# EAGLE board placa_conexoes_painel2 (EAGLE 7.7.0)
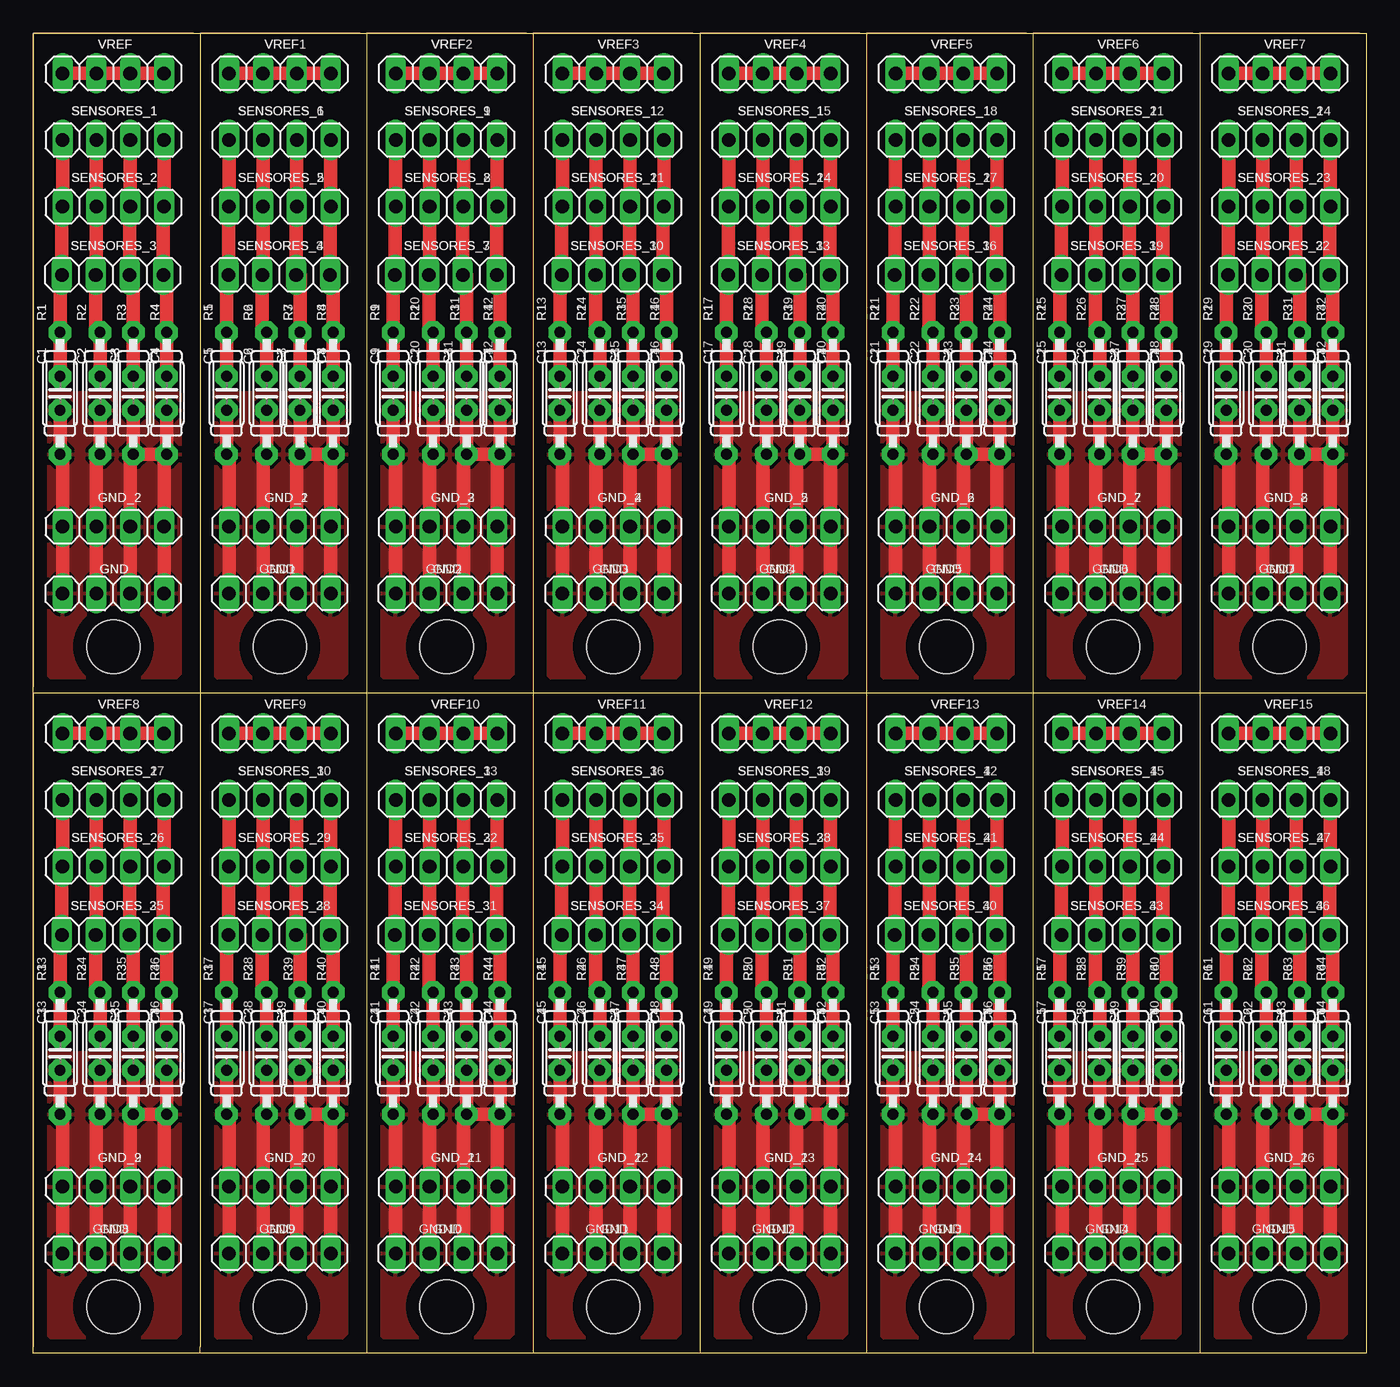
[diagram p0: board, top side]

Size 100 x 99 mm. Coordinates in mm from the lower left corner, seen from the top.
Outline: 12,99 0,99
Outline: 0,99 0,50
Outline: 24.5,99 12.5,99 12.5,50 12.5,49.5
Outline: 37,99 25,99 25,50 25,49
Outline: 49.5,99 37.5,99 37.5,50 37.5,49.5
Outline: 62,99 50,99 50,50 50,49
Outline: 74.5,99 62.5,99 62.5,50 62.5,49.5
Outline: 87,99 75,99 75,50 75,49
Outline: 99.5,99 99,99
Outline: 99,99 87.5,99 87.5,50 87.5,49
Outline: 0,49.5 0,49
Outline: 0,49 0,0.5
Outline: 12.5,49.5 12.5,0.5 12.5,0 25,0
Outline: 25,49.5 25,49
Outline: 25,49 25,1
Outline: 25,1 25,0.5
Outline: 49.5,49.5 37.5,49.5
Outline: 37.5,49.5 37.5,0.5 37.5,0
Outline: 62,49.5 50,49.5 50,49
Outline: 50,49 50,1
Outline: 50,1 50,0.5
Outline: 74.5,49.5 62.5,49.5
Outline: 62.5,49.5 62.5,0.5 62.5,0
Outline: 87,49.5 75,49.5 75,49
Outline: 75,49 75,1
Outline: 75,1 75,0.5
Outline: 99.5,49.5 87.5,49.5 87.5,49
Outline: 87.5,49 87.5,0.5 87.5,0
Outline: 0,49 0,0 25,0
Outline: 0,49 0,50
Outline: 0,50 0,99
Outline: 0,99 99,99
Outline: 99,99 100,99 100,49.5
Outline: 100,49.5 100,0 87.5,0
Outline: 87.5,0 75,0
Outline: 75,0 62.5,0
Outline: 62.5,0 50,0
Outline: 50,0 37.5,0
Outline: 37.5,0 25,0
Outline: 37.5,49.5 12.5,49.5
Outline: 12.5,49.5 0,49.5
Outline: 0,49.5 0,49
Outline: 100,49.5 62.5,49.5
Outline: 62.5,49.5 37.5,49.5
Outline: 37.5,49.5 0,49.5
Outline: 0,49.5 0,50
Outline: 75,1 75,0
Outline: 50,1 50,0
Outline: 25,1 25,0
Copper layers (1*16): Top 0.035mm / dielectric 1.5mm / Bottom 0.035mm
Design rules "default": minimum track width 10mil, minimum drill 24mil, track to track 8mil, track to pad 8mil, pad to pad 8mil, via to via 8mil, smd to smd 8mil, copper to edge 40mil, drill to drill 8mil, minimum pad ring 10mil, minimum via ring 8mil, stop-mask expansion 4mil, vias tented up to drill 0mil, thermal gap 10mil
Holes 4 mm at 6,53 18.5,53 31,53 43.5,53 56,53 68.5,53 81,53 93.5,53 6,3.5 18.5,3.5 31,3.5 43.5,3.5 56,3.5 68.5,3.5 81,3.5 93.5,3.5

## Footprints (pad centres in the part's own frame; a part is rotated, then mirrored left to right if it is on the bottom)
C025-025X050 = drill 0.813 pad 1.676 octagon: 1 -1.27,0; 2 1.27,0
1X04 = drill 1.016 long: 1 -3.81,0; 2 -1.27,0; 3 1.27,0; 4 3.81,0
0207/9 = drill 0.813 pad 1.676 octagon: 1 -4.572,0; 2 4.572,0

## Placement (x,y rotation side)
C1  [C025-025X050]  2,72 90 top
C2  [C025-025X050]  5,72 90 top
C3  [C025-025X050]  7.5,72 90 top
C4  [C025-025X050]  10,72 90 top
C5  [C025-025X050]  14.5,72 90 top
C6  [C025-025X050]  17.5,72 90 top
C7  [C025-025X050]  20,72 90 top
C8  [C025-025X050]  22.5,72 90 top
C9  [C025-025X050]  27,72 90 top
C10  [C025-025X050]  30,72 90 top
C11  [C025-025X050]  32.5,72 90 top
C12  [C025-025X050]  35,72 90 top
C13  [C025-025X050]  39.5,72 90 top
C14  [C025-025X050]  42.5,72 90 top
C15  [C025-025X050]  45,72 90 top
C16  [C025-025X050]  47.5,72 90 top
C17  [C025-025X050]  52,72 90 top
C18  [C025-025X050]  55,72 90 top
C19  [C025-025X050]  57.5,72 90 top
C20  [C025-025X050]  60,72 90 top
C21  [C025-025X050]  64.5,72 90 top
C22  [C025-025X050]  67.5,72 90 top
C23  [C025-025X050]  70,72 90 top
C24  [C025-025X050]  72.5,72 90 top
C25  [C025-025X050]  77,72 90 top
C26  [C025-025X050]  80,72 90 top
C27  [C025-025X050]  82.5,72 90 top
C28  [C025-025X050]  85,72 90 top
C29  [C025-025X050]  89.5,72 90 top
C30  [C025-025X050]  92.5,72 90 top
C31  [C025-025X050]  95,72 90 top
C32  [C025-025X050]  97.5,72 90 top
C33  [C025-025X050]  2,22.5 90 top
C34  [C025-025X050]  5,22.5 90 top
C35  [C025-025X050]  7.5,22.5 90 top
C36  [C025-025X050]  10,22.5 90 top
C37  [C025-025X050]  14.5,22.5 90 top
C38  [C025-025X050]  17.5,22.5 90 top
C39  [C025-025X050]  20,22.5 90 top
C40  [C025-025X050]  22.5,22.5 90 top
C41  [C025-025X050]  27,22.5 90 top
C42  [C025-025X050]  30,22.5 90 top
C43  [C025-025X050]  32.5,22.5 90 top
C44  [C025-025X050]  35,22.5 90 top
C45  [C025-025X050]  39.5,22.5 90 top
C46  [C025-025X050]  42.5,22.5 90 top
C47  [C025-025X050]  45,22.5 90 top
C48  [C025-025X050]  47.5,22.5 90 top
C49  [C025-025X050]  52,22.5 90 top
C50  [C025-025X050]  55,22.5 90 top
C51  [C025-025X050]  57.5,22.5 90 top
C52  [C025-025X050]  60,22.5 90 top
C53  [C025-025X050]  64.5,22.5 90 top
C54  [C025-025X050]  67.5,22.5 90 top
C55  [C025-025X050]  70,22.5 90 top
C56  [C025-025X050]  72.5,22.5 90 top
C57  [C025-025X050]  77,22.5 90 top
C58  [C025-025X050]  80,22.5 90 top
C59  [C025-025X050]  82.5,22.5 90 top
C60  [C025-025X050]  85,22.5 90 top
C61  [C025-025X050]  89.5,22.5 90 top
C62  [C025-025X050]  92.5,22.5 90 top
C63  [C025-025X050]  95,22.5 90 top
C64  [C025-025X050]  97.5,22.5 90 top
GND  [1X04]  6,57 180 top
GND1  [1X04]  18.5,57 180 top
GND2  [1X04]  31,57 180 top
GND3  [1X04]  43.5,57 180 top
GND4  [1X04]  56,57 180 top
GND5  [1X04]  68.5,57 180 top
GND6  [1X04]  81,57 180 top
GND7  [1X04]  93.5,57 180 top
GND8  [1X04]  6,7.5 180 top
GND9  [1X04]  18.5,7.5 180 top
GND10  [1X04]  31,7.5 180 top
GND11  [1X04]  43.5,7.5 180 top
GND12  [1X04]  56,7.5 180 top
GND13  [1X04]  68.5,7.5 180 top
GND14  [1X04]  81,7.5 180 top
GND15  [1X04]  93.5,7.5 180 top
GND_1  [1X04]  18.5,62 0 top
GND_2  [1X04]  6,62 0 top
GND_3  [1X04]  31,62 0 top
GND_4  [1X04]  43.5,62 0 top
GND_5  [1X04]  56,62 0 top
GND_6  [1X04]  68.5,62 0 top
GND_7  [1X04]  81,62 0 top
GND_8  [1X04]  93.5,62 0 top
GND_9  [1X04]  6,12.5 0 top
GND_10  [1X04]  18.5,12.5 0 top
GND_11  [1X04]  31,12.5 0 top
GND_12  [1X04]  43.5,12.5 0 top
GND_13  [1X04]  56,12.5 0 top
GND_14  [1X04]  68.5,12.5 0 top
GND_15  [1X04]  81,12.5 0 top
GND_16  [1X04]  93.5,12.5 0 top
R1  [0207/9]  2,72 90 top
R2  [0207/9]  5,72 90 top
R3  [0207/9]  7.5,72 90 top
R4  [0207/9]  10,72 90 top
R5  [0207/9]  14.5,72 90 top
R6  [0207/9]  17.5,72 90 top
R7  [0207/9]  20,72 90 top
R8  [0207/9]  22.5,72 90 top
R9  [0207/9]  27,72 90 top
R10  [0207/9]  30,72 90 top
R11  [0207/9]  32.5,72 90 top
R12  [0207/9]  35,72 90 top
R13  [0207/9]  39.5,72 90 top
R14  [0207/9]  42.5,72 90 top
R15  [0207/9]  45,72 90 top
R16  [0207/9]  47.5,72 90 top
R17  [0207/9]  52,72 90 top
R18  [0207/9]  55,72 90 top
R19  [0207/9]  57.5,72 90 top
R20  [0207/9]  60,72 90 top
R21  [0207/9]  64.5,72 90 top
R22  [0207/9]  67.5,72 90 top
R23  [0207/9]  70,72 90 top
R24  [0207/9]  72.5,72 90 top
R25  [0207/9]  77,72 90 top
R26  [0207/9]  80,72 90 top
R27  [0207/9]  82.5,72 90 top
R28  [0207/9]  85,72 90 top
R29  [0207/9]  89.5,72 90 top
R30  [0207/9]  92.5,72 90 top
R31  [0207/9]  95,72 90 top
R32  [0207/9]  97.5,72 90 top
R33  [0207/9]  2,22.5 90 top
R34  [0207/9]  5,22.5 90 top
R35  [0207/9]  7.5,22.5 90 top
R36  [0207/9]  10,22.5 90 top
R37  [0207/9]  14.5,22.5 90 top
R38  [0207/9]  17.5,22.5 90 top
R39  [0207/9]  20,22.5 90 top
R40  [0207/9]  22.5,22.5 90 top
R41  [0207/9]  27,22.5 90 top
R42  [0207/9]  30,22.5 90 top
R43  [0207/9]  32.5,22.5 90 top
R44  [0207/9]  35,22.5 90 top
R45  [0207/9]  39.5,22.5 90 top
R46  [0207/9]  42.5,22.5 90 top
R47  [0207/9]  45,22.5 90 top
R48  [0207/9]  47.5,22.5 90 top
R49  [0207/9]  52,22.5 90 top
R50  [0207/9]  55,22.5 90 top
R51  [0207/9]  57.5,22.5 90 top
R52  [0207/9]  60,22.5 90 top
R53  [0207/9]  64.5,22.5 90 top
R54  [0207/9]  67.5,22.5 90 top
R55  [0207/9]  70,22.5 90 top
R56  [0207/9]  72.5,22.5 90 top
R57  [0207/9]  77,22.5 90 top
R58  [0207/9]  80,22.5 90 top
R59  [0207/9]  82.5,22.5 90 top
R60  [0207/9]  85,22.5 90 top
R61  [0207/9]  89.5,22.5 90 top
R62  [0207/9]  92.5,22.5 90 top
R63  [0207/9]  95,22.5 90 top
R64  [0207/9]  97.5,22.5 90 top
SENSORES_1  [1X04]  6,91 0 top
SENSORES_2  [1X04]  6,86 0 top
SENSORES_3  [1X04]  5.95,80.89 0 top
SENSORES_4  [1X04]  18.45,80.89 0 top
SENSORES_5  [1X04]  18.5,86 0 top
SENSORES_6  [1X04]  18.5,91 0 top
SENSORES_7  [1X04]  30.95,80.89 0 top
SENSORES_8  [1X04]  31,86 0 top
SENSORES_9  [1X04]  31,91 0 top
SENSORES_10  [1X04]  43.45,80.89 0 top
SENSORES_11  [1X04]  43.5,86 0 top
SENSORES_12  [1X04]  43.5,91 0 top
SENSORES_13  [1X04]  55.95,80.89 0 top
SENSORES_14  [1X04]  56,86 0 top
SENSORES_15  [1X04]  56,91 0 top
SENSORES_16  [1X04]  68.45,80.89 0 top
SENSORES_17  [1X04]  68.5,86 0 top
SENSORES_18  [1X04]  68.5,91 0 top
SENSORES_19  [1X04]  80.95,80.89 0 top
SENSORES_20  [1X04]  81,86 0 top
SENSORES_21  [1X04]  81,91 0 top
SENSORES_22  [1X04]  93.45,80.89 0 top
SENSORES_23  [1X04]  93.5,86 0 top
SENSORES_24  [1X04]  93.5,91 0 top
SENSORES_25  [1X04]  5.95,31.39 0 top
SENSORES_26  [1X04]  6,36.5 0 top
SENSORES_27  [1X04]  6,41.5 0 top
SENSORES_28  [1X04]  18.45,31.39 0 top
SENSORES_29  [1X04]  18.5,36.5 0 top
SENSORES_30  [1X04]  18.5,41.5 0 top
SENSORES_31  [1X04]  30.95,31.39 0 top
SENSORES_32  [1X04]  31,36.5 0 top
SENSORES_33  [1X04]  31,41.5 0 top
SENSORES_34  [1X04]  43.45,31.39 0 top
SENSORES_35  [1X04]  43.5,36.5 0 top
SENSORES_36  [1X04]  43.5,41.5 0 top
SENSORES_37  [1X04]  55.95,31.39 0 top
SENSORES_38  [1X04]  56,36.5 0 top
SENSORES_39  [1X04]  56,41.5 0 top
SENSORES_40  [1X04]  68.45,31.39 0 top
SENSORES_41  [1X04]  68.5,36.5 0 top
SENSORES_42  [1X04]  68.5,41.5 0 top
SENSORES_43  [1X04]  80.95,31.39 0 top
SENSORES_44  [1X04]  81,36.5 0 top
SENSORES_45  [1X04]  81,41.5 0 top
SENSORES_46  [1X04]  93.45,31.39 0 top
SENSORES_47  [1X04]  93.5,36.5 0 top
SENSORES_48  [1X04]  93.5,41.5 0 top
VREF  [1X04]  6,96 0 top
VREF1  [1X04]  18.5,96 0 top
VREF2  [1X04]  31,96 0 top
VREF3  [1X04]  43.5,96 0 top
VREF4  [1X04]  56,96 0 top
VREF5  [1X04]  68.5,96 0 top
VREF6  [1X04]  81,96 0 top
VREF7  [1X04]  93.5,96 0 top
VREF8  [1X04]  6,46.5 0 top
VREF9  [1X04]  18.5,46.5 0 top
VREF10  [1X04]  31,46.5 0 top
VREF11  [1X04]  43.5,46.5 0 top
VREF12  [1X04]  56,46.5 0 top
VREF13  [1X04]  68.5,46.5 0 top
VREF14  [1X04]  81,46.5 0 top
VREF15  [1X04]  93.5,46.5 0 top

## Library data of the parts
C1-C64 R1-R64 = adafruit
GND GND1-GND15 GND_1-GND_16 SENSORES_1-SENSORES_48 VREF VREF1-VREF15 = pinhead

## Nets
ADC1: C1.2 R1.2 SENSORES_1.1 SENSORES_2.1 SENSORES_3.1
ADC2: C2.2 R2.2 SENSORES_1.2 SENSORES_2.2 SENSORES_3.2
ADC3: C3.2 R3.2 SENSORES_1.3 SENSORES_2.3 SENSORES_3.3
ADC4: C4.2 R4.2 SENSORES_1.4 SENSORES_2.4 SENSORES_3.4
ADC5: C8.2 R8.2 SENSORES_4.4 SENSORES_5.4 SENSORES_6.4
ADC6: C7.2 R7.2 SENSORES_4.3 SENSORES_5.3 SENSORES_6.3
ADC7: C6.2 R6.2 SENSORES_4.2 SENSORES_5.2 SENSORES_6.2
ADC8: C5.2 R5.2 SENSORES_4.1 SENSORES_5.1 SENSORES_6.1
ADC9: C12.2 R12.2 SENSORES_7.4 SENSORES_8.4 SENSORES_9.4
ADC10: C11.2 R11.2 SENSORES_7.3 SENSORES_8.3 SENSORES_9.3
ADC11: C10.2 R10.2 SENSORES_7.2 SENSORES_8.2 SENSORES_9.2
ADC12: C9.2 R9.2 SENSORES_7.1 SENSORES_8.1 SENSORES_9.1
ADC13: C16.2 R16.2 SENSORES_10.4 SENSORES_11.4 SENSORES_12.4
ADC14: C15.2 R15.2 SENSORES_10.3 SENSORES_11.3 SENSORES_12.3
ADC15: C14.2 R14.2 SENSORES_10.2 SENSORES_11.2 SENSORES_12.2
ADC16: C13.2 R13.2 SENSORES_10.1 SENSORES_11.1 SENSORES_12.1
ADC17: C20.2 R20.2 SENSORES_13.4 SENSORES_14.4 SENSORES_15.4
ADC18: C19.2 R19.2 SENSORES_13.3 SENSORES_14.3 SENSORES_15.3
ADC19: C18.2 R18.2 SENSORES_13.2 SENSORES_14.2 SENSORES_15.2
ADC20: C17.2 R17.2 SENSORES_13.1 SENSORES_14.1 SENSORES_15.1
ADC21: C24.2 R24.2 SENSORES_16.4 SENSORES_17.4 SENSORES_18.4
ADC22: C23.2 R23.2 SENSORES_16.3 SENSORES_17.3 SENSORES_18.3
ADC23: C22.2 R22.2 SENSORES_16.2 SENSORES_17.2 SENSORES_18.2
ADC24: C21.2 R21.2 SENSORES_16.1 SENSORES_17.1 SENSORES_18.1
ADC25: C28.2 R28.2 SENSORES_19.4 SENSORES_20.4 SENSORES_21.4
ADC26: C27.2 R27.2 SENSORES_19.3 SENSORES_20.3 SENSORES_21.3
ADC27: C26.2 R26.2 SENSORES_19.2 SENSORES_20.2 SENSORES_21.2
ADC28: C25.2 R25.2 SENSORES_19.1 SENSORES_20.1 SENSORES_21.1
ADC29: C32.2 R32.2 SENSORES_22.4 SENSORES_23.4 SENSORES_24.4
ADC30: C31.2 R31.2 SENSORES_22.3 SENSORES_23.3 SENSORES_24.3
ADC31: C30.2 R30.2 SENSORES_22.2 SENSORES_23.2 SENSORES_24.2
ADC32: C29.2 R29.2 SENSORES_22.1 SENSORES_23.1 SENSORES_24.1
ADC33: C36.2 R36.2 SENSORES_25.4 SENSORES_26.4 SENSORES_27.4
ADC34: C35.2 R35.2 SENSORES_25.3 SENSORES_26.3 SENSORES_27.3
ADC35: C34.2 R34.2 SENSORES_25.2 SENSORES_26.2 SENSORES_27.2
ADC36: C33.2 R33.2 SENSORES_25.1 SENSORES_26.1 SENSORES_27.1
ADC37: C40.2 R40.2 SENSORES_28.4 SENSORES_29.4 SENSORES_30.4
ADC38: C39.2 R39.2 SENSORES_28.3 SENSORES_29.3 SENSORES_30.3
ADC39: C38.2 R38.2 SENSORES_28.2 SENSORES_29.2 SENSORES_30.2
ADC40: C37.2 R37.2 SENSORES_28.1 SENSORES_29.1 SENSORES_30.1
ADC41: C44.2 R44.2 SENSORES_31.4 SENSORES_32.4 SENSORES_33.4
ADC42: C43.2 R43.2 SENSORES_31.3 SENSORES_32.3 SENSORES_33.3
ADC43: C42.2 R42.2 SENSORES_31.2 SENSORES_32.2 SENSORES_33.2
ADC44: C41.2 R41.2 SENSORES_31.1 SENSORES_32.1 SENSORES_33.1
ADC45: C48.2 R48.2 SENSORES_34.4 SENSORES_35.4 SENSORES_36.4
ADC46: C47.2 R47.2 SENSORES_34.3 SENSORES_35.3 SENSORES_36.3
ADC47: C46.2 R46.2 SENSORES_34.2 SENSORES_35.2 SENSORES_36.2
ADC48: C45.2 R45.2 SENSORES_34.1 SENSORES_35.1 SENSORES_36.1
ADC49: C52.2 R52.2 SENSORES_37.4 SENSORES_38.4 SENSORES_39.4
ADC50: C51.2 R51.2 SENSORES_37.3 SENSORES_38.3 SENSORES_39.3
ADC51: C50.2 R50.2 SENSORES_37.2 SENSORES_38.2 SENSORES_39.2
ADC52: C49.2 R49.2 SENSORES_37.1 SENSORES_38.1 SENSORES_39.1
ADC53: C56.2 R56.2 SENSORES_40.4 SENSORES_41.4 SENSORES_42.4
ADC54: C55.2 R55.2 SENSORES_40.3 SENSORES_41.3 SENSORES_42.3
ADC55: C54.2 R54.2 SENSORES_40.2 SENSORES_41.2 SENSORES_42.2
ADC56: C53.2 R53.2 SENSORES_40.1 SENSORES_41.1 SENSORES_42.1
ADC57: C60.2 R60.2 SENSORES_43.4 SENSORES_44.4 SENSORES_45.4
ADC58: C59.2 R59.2 SENSORES_43.3 SENSORES_44.3 SENSORES_45.3
ADC59: C58.2 R58.2 SENSORES_43.2 SENSORES_44.2 SENSORES_45.2
ADC60: C57.2 R57.2 SENSORES_43.1 SENSORES_44.1 SENSORES_45.1
ADC61: C64.2 R64.2 SENSORES_46.4 SENSORES_47.4 SENSORES_48.4
ADC62: C63.2 R63.2 SENSORES_46.3 SENSORES_47.3 SENSORES_48.3
ADC63: C62.2 R62.2 SENSORES_46.2 SENSORES_47.2 SENSORES_48.2
ADC64: C61.2 R61.2 SENSORES_46.1 SENSORES_47.1 SENSORES_48.1
GND: C1.1 C2.1 C3.1 C4.1 GND.1 GND.2 GND.3 GND.4 GND_2.1 GND_2.2 GND_2.3 GND_2.4 R1.1 R2.1 R3.1 R4.1
GND1: C5.1 C6.1 C7.1 C8.1 GND1.1 GND1.2 GND1.3 GND1.4 GND_1.1 GND_1.2 GND_1.3 GND_1.4 R5.1 R6.1 R7.1 R8.1
GND2: C9.1 C10.1 C11.1 C12.1 GND2.1 GND2.2 GND2.3 GND2.4 GND_3.1 GND_3.2 GND_3.3 GND_3.4 R9.1 R10.1 R11.1 R12.1
GND3: C13.1 C14.1 C15.1 C16.1 GND3.1 GND3.2 GND3.3 GND3.4 GND_4.1 GND_4.2 GND_4.3 GND_4.4 R13.1 R14.1 R15.1 R16.1
GND4: C17.1 C18.1 C19.1 C20.1 GND4.1 GND4.2 GND4.3 GND4.4 GND_5.1 GND_5.2 GND_5.3 GND_5.4 R17.1 R18.1 R19.1 R20.1
GND5: C21.1 C22.1 C23.1 C24.1 GND5.1 GND5.2 GND5.3 GND5.4 GND_6.1 GND_6.2 GND_6.3 GND_6.4 R21.1 R22.1 R23.1 R24.1
GND6: C25.1 C26.1 C27.1 C28.1 GND6.1 GND6.2 GND6.3 GND6.4 GND_7.1 GND_7.2 GND_7.3 GND_7.4 R25.1 R26.1 R27.1 R28.1
GND7: C29.1 C30.1 C31.1 C32.1 GND7.1 GND7.2 GND7.3 GND7.4 GND_8.1 GND_8.2 GND_8.3 GND_8.4 R29.1 R30.1 R31.1 R32.1
GND8: C33.1 C34.1 C35.1 C36.1 GND8.1 GND8.2 GND8.3 GND8.4 GND_9.1 GND_9.2 GND_9.3 GND_9.4 R33.1 R34.1 R35.1 R36.1
GND9: C37.1 C38.1 C39.1 C40.1 GND9.1 GND9.2 GND9.3 GND9.4 GND_10.1 GND_10.2 GND_10.3 GND_10.4 R37.1 R38.1 R39.1 R40.1
GND10: C41.1 C42.1 C43.1 C44.1 GND10.1 GND10.2 GND10.3 GND10.4 GND_11.1 GND_11.2 GND_11.3 GND_11.4 R41.1 R42.1 R43.1 R44.1
GND11: C45.1 C46.1 C47.1 C48.1 GND11.1 GND11.2 GND11.3 GND11.4 GND_12.1 GND_12.2 GND_12.3 GND_12.4 R45.1 R46.1 R47.1 R48.1
GND12: C49.1 C50.1 C51.1 C52.1 GND12.1 GND12.2 GND12.3 GND12.4 GND_13.1 GND_13.2 GND_13.3 GND_13.4 R49.1 R50.1 R51.1 R52.1
GND13: C53.1 C54.1 C55.1 C56.1 GND13.1 GND13.2 GND13.3 GND13.4 GND_14.1 GND_14.2 GND_14.3 GND_14.4 R53.1 R54.1 R55.1 R56.1
GND14: C57.1 C58.1 C59.1 C60.1 GND14.1 GND14.2 GND14.3 GND14.4 GND_15.1 GND_15.2 GND_15.3 GND_15.4 R57.1 R58.1 R59.1 R60.1
GND15: C61.1 C62.1 C63.1 C64.1 GND15.1 GND15.2 GND15.3 GND15.4 GND_16.1 GND_16.2 GND_16.3 GND_16.4 R61.1 R62.1 R63.1 R64.1
VCC: VREF.1 VREF.2 VREF.3 VREF.4
VCC1: VREF1.1 VREF1.2 VREF1.3 VREF1.4
VCC2: VREF2.1 VREF2.2 VREF2.3 VREF2.4
VCC3: VREF3.1 VREF3.2 VREF3.3 VREF3.4
VCC4: VREF4.1 VREF4.2 VREF4.3 VREF4.4
VCC5: VREF5.1 VREF5.2 VREF5.3 VREF5.4
VCC6: VREF6.1 VREF6.2 VREF6.3 VREF6.4
VCC7: VREF7.1 VREF7.2 VREF7.3 VREF7.4
VCC8: VREF8.1 VREF8.2 VREF8.3 VREF8.4
VCC9: VREF9.1 VREF9.2 VREF9.3 VREF9.4
VCC10: VREF10.1 VREF10.2 VREF10.3 VREF10.4
VCC11: VREF11.1 VREF11.2 VREF11.3 VREF11.4
VCC12: VREF12.1 VREF12.2 VREF12.3 VREF12.4
VCC13: VREF13.1 VREF13.2 VREF13.3 VREF13.4
VCC14: VREF14.1 VREF14.2 VREF14.3 VREF14.4
VCC15: VREF15.1 VREF15.2 VREF15.3 VREF15.4

## Tracks (layer width: path | path; a pad name or v marks a point on that pad's centre or on a via)
ADC1
  Top 1.016: SENSORES_1.1 SENSORES_2.1 2.14,86 SENSORES_3.1 2,80.89 R1.2 C1.2
ADC2
  Top 1.016: C2.2 R2.2 4.68,76.57 SENSORES_3.2 4.73,80.89 SENSORES_2.2 SENSORES_1.2
ADC3
  Top 1.016: SENSORES_1.3 SENSORES_2.3 7.22,86 SENSORES_3.3 7.5,80.89 R3.2 C3.2
ADC4
  Top 1.016: SENSORES_1.4 SENSORES_2.4 9.76,86 SENSORES_3.4 10,80.89 R4.2 C4.2
ADC5
  Top 1.016: SENSORES_6.4 SENSORES_5.4 22.26,86 SENSORES_4.4 22.5,80.89 R8.2 C8.2
ADC6
  Top 1.016: SENSORES_6.3 SENSORES_5.3 19.72,86 SENSORES_4.3 20,80.89 R7.2 C7.2
ADC7
  Top 1.016: C6.2 R6.2 17.18,76.57 SENSORES_4.2 17.23,80.89 SENSORES_5.2 SENSORES_6.2
ADC8
  Top 1.016: SENSORES_6.1 SENSORES_5.1 14.64,86 SENSORES_4.1 14.5,80.89 R5.2 C5.2
ADC9
  Top 1.016: SENSORES_9.4 SENSORES_8.4 34.76,86 SENSORES_7.4 35,80.89 R12.2 C12.2
ADC10
  Top 1.016: SENSORES_9.3 SENSORES_8.3 32.22,86 SENSORES_7.3 32.5,80.89 R11.2 C11.2
ADC11
  Top 1.016: C10.2 R10.2 29.68,76.57 SENSORES_7.2 29.73,80.89 SENSORES_8.2 SENSORES_9.2
ADC12
  Top 1.016: SENSORES_9.1 SENSORES_8.1 27.14,86 SENSORES_7.1 27,80.89 R9.2 C9.2
ADC13
  Top 1.016: SENSORES_12.4 SENSORES_11.4 47.26,86 SENSORES_10.4 47.5,80.89 R16.2 C16.2
ADC14
  Top 1.016: SENSORES_12.3 SENSORES_11.3 44.72,86 SENSORES_10.3 45,80.89 R15.2 C15.2
ADC15
  Top 1.016: C14.2 R14.2 42.18,76.57 SENSORES_10.2 42.23,80.89 SENSORES_11.2 SENSORES_12.2
ADC16
  Top 1.016: SENSORES_12.1 SENSORES_11.1 39.64,86 SENSORES_10.1 39.5,80.89 R13.2 C13.2
ADC17
  Top 1.016: SENSORES_15.4 SENSORES_14.4 59.76,86 SENSORES_13.4 60,80.89 R20.2 C20.2
ADC18
  Top 1.016: SENSORES_15.3 SENSORES_14.3 57.22,86 SENSORES_13.3 57.5,80.89 R19.2 C19.2
ADC19
  Top 1.016: C18.2 R18.2 54.68,76.57 SENSORES_13.2 54.73,80.89 SENSORES_14.2 SENSORES_15.2
ADC20
  Top 1.016: SENSORES_15.1 SENSORES_14.1 52.14,86 SENSORES_13.1 52,80.89 R17.2 C17.2
ADC21
  Top 1.016: SENSORES_18.4 SENSORES_17.4 72.26,86 SENSORES_16.4 72.5,80.89 R24.2 C24.2
ADC22
  Top 1.016: SENSORES_18.3 SENSORES_17.3 69.72,86 SENSORES_16.3 70,80.89 R23.2 C23.2
ADC23
  Top 1.016: C22.2 R22.2 67.18,76.57 SENSORES_16.2 67.23,80.89 SENSORES_17.2 SENSORES_18.2
ADC24
  Top 1.016: SENSORES_18.1 SENSORES_17.1 64.64,86 SENSORES_16.1 64.5,80.89 R21.2 C21.2
ADC25
  Top 1.016: SENSORES_21.4 SENSORES_20.4 84.76,86 SENSORES_19.4 85,80.89 R28.2 C28.2
ADC26
  Top 1.016: SENSORES_21.3 SENSORES_20.3 82.22,86 SENSORES_19.3 82.5,80.89 R27.2 C27.2
ADC27
  Top 1.016: C26.2 R26.2 79.68,76.57 SENSORES_19.2 79.73,80.89 SENSORES_20.2 SENSORES_21.2
ADC28
  Top 1.016: SENSORES_21.1 SENSORES_20.1 77.14,86 SENSORES_19.1 77,80.89 R25.2 C25.2
ADC29
  Top 1.016: SENSORES_24.4 SENSORES_23.4 97.26,86 SENSORES_22.4 97.5,80.89 R32.2 C32.2
ADC30
  Top 1.016: SENSORES_24.3 SENSORES_23.3 94.72,86 SENSORES_22.3 95,80.89 R31.2 C31.2
ADC31
  Top 1.016: C30.2 R30.2 92.18,76.57 SENSORES_22.2 92.23,80.89 SENSORES_23.2 SENSORES_24.2
ADC32
  Top 1.016: SENSORES_24.1 SENSORES_23.1 89.64,86 SENSORES_22.1 89.5,80.89 R29.2 C29.2
ADC33
  Top 1.016: SENSORES_27.4 SENSORES_26.4 9.76,36.5 SENSORES_25.4 10,31.39 R36.2 C36.2
ADC34
  Top 1.016: SENSORES_27.3 SENSORES_26.3 7.22,36.5 SENSORES_25.3 7.5,31.39 R35.2 C35.2
ADC35
  Top 1.016: C34.2 R34.2 4.68,27.07 SENSORES_25.2 4.73,31.39 SENSORES_26.2 SENSORES_27.2
ADC36
  Top 1.016: SENSORES_27.1 SENSORES_26.1 2.14,36.5 SENSORES_25.1 2,31.39 R33.2 C33.2
ADC37
  Top 1.016: SENSORES_30.4 SENSORES_29.4 22.26,36.5 SENSORES_28.4 22.5,31.39 R40.2 C40.2
ADC38
  Top 1.016: SENSORES_30.3 SENSORES_29.3 19.72,36.5 SENSORES_28.3 20,31.39 R39.2 C39.2
ADC39
  Top 1.016: C38.2 R38.2 17.18,27.07 SENSORES_28.2 17.23,31.39 SENSORES_29.2 SENSORES_30.2
ADC40
  Top 1.016: SENSORES_30.1 SENSORES_29.1 14.64,36.5 SENSORES_28.1 14.5,31.39 R37.2 C37.2
ADC41
  Top 1.016: SENSORES_33.4 SENSORES_32.4 34.76,36.5 SENSORES_31.4 35,31.39 R44.2 C44.2
ADC42
  Top 1.016: SENSORES_33.3 SENSORES_32.3 32.22,36.5 SENSORES_31.3 32.5,31.39 R43.2 C43.2
ADC43
  Top 1.016: C42.2 R42.2 29.68,27.07 SENSORES_31.2 29.73,31.39 SENSORES_32.2 SENSORES_33.2
ADC44
  Top 1.016: SENSORES_33.1 SENSORES_32.1 27.14,36.5 SENSORES_31.1 27,31.39 R41.2 C41.2
ADC45
  Top 1.016: SENSORES_36.4 SENSORES_35.4 47.26,36.5 SENSORES_34.4 47.5,31.39 R48.2 C48.2
ADC46
  Top 1.016: SENSORES_36.3 SENSORES_35.3 44.72,36.5 SENSORES_34.3 45,31.39 R47.2 C47.2
ADC47
  Top 1.016: C46.2 R46.2 42.18,27.07 SENSORES_34.2 42.23,31.39 SENSORES_35.2 SENSORES_36.2
ADC48
  Top 1.016: SENSORES_36.1 SENSORES_35.1 39.64,36.5 SENSORES_34.1 39.5,31.39 R45.2 C45.2
ADC49
  Top 1.016: SENSORES_39.4 SENSORES_38.4 59.76,36.5 SENSORES_37.4 60,31.39 R52.2 C52.2
ADC50
  Top 1.016: SENSORES_39.3 SENSORES_38.3 57.22,36.5 SENSORES_37.3 57.5,31.39 R51.2 C51.2
ADC51
  Top 1.016: C50.2 R50.2 54.68,27.07 SENSORES_37.2 54.73,31.39 SENSORES_38.2 SENSORES_39.2
ADC52
  Top 1.016: SENSORES_39.1 SENSORES_38.1 52.14,36.5 SENSORES_37.1 52,31.39 R49.2 C49.2
ADC53
  Top 1.016: SENSORES_42.4 SENSORES_41.4 72.26,36.5 SENSORES_40.4 72.5,31.39 R56.2 C56.2
ADC54
  Top 1.016: SENSORES_42.3 SENSORES_41.3 69.72,36.5 SENSORES_40.3 70,31.39 R55.2 C55.2
ADC55
  Top 1.016: C54.2 R54.2 67.18,27.07 SENSORES_40.2 67.23,31.39 SENSORES_41.2 SENSORES_42.2
ADC56
  Top 1.016: SENSORES_42.1 SENSORES_41.1 64.64,36.5 SENSORES_40.1 64.5,31.39 R53.2 C53.2
ADC57
  Top 1.016: SENSORES_45.4 SENSORES_44.4 84.76,36.5 SENSORES_43.4 85,31.39 R60.2 C60.2
ADC58
  Top 1.016: SENSORES_45.3 SENSORES_44.3 82.22,36.5 SENSORES_43.3 82.5,31.39 R59.2 C59.2
ADC59
  Top 1.016: C58.2 R58.2 79.68,27.07 SENSORES_43.2 79.73,31.39 SENSORES_44.2 SENSORES_45.2
ADC60
  Top 1.016: SENSORES_45.1 SENSORES_44.1 77.14,36.5 SENSORES_43.1 77,31.39 R57.2 C57.2
ADC61
  Top 1.016: SENSORES_48.4 SENSORES_47.4 97.26,36.5 SENSORES_46.4 97.5,31.39 R64.2 C64.2
ADC62
  Top 1.016: SENSORES_48.3 SENSORES_47.3 94.72,36.5 SENSORES_46.3 95,31.39 R63.2 C63.2
ADC63
  Top 1.016: C62.2 R62.2 92.18,27.07 SENSORES_46.2 92.23,31.39 SENSORES_47.2 SENSORES_48.2
ADC64
  Top 1.016: SENSORES_48.1 SENSORES_47.1 89.64,36.5 SENSORES_46.1 89.5,31.39 R61.2 C61.2
GND
  Top 1.016: C1.1 R1.1 2.19,67.43 GND_2.1 GND.4 | C2.1 R2.1 4.73,67.43 GND_2.2 GND.3 | C3.1 R3.1 7.27,67.43 | 7.27,67.43 GND_2.3 GND.2 | C4.1 R4.1 | 7.27,67.43 9.81,67.43 GND_2.4 GND.1
  pour Top: 11,72 0.5,72 0.5,51.5 2,50 10,50 11,51
GND1
  Top 1.016: C5.1 R5.1 14.69,67.43 GND_1.1 GND1.4 | C6.1 R6.1 17.23,67.43 GND_1.2 GND1.3 | C7.1 R7.1 19.77,67.43 | 19.77,67.43 GND_1.3 GND1.2 | C8.1 R8.1 | 19.77,67.43 22.31,67.43 GND_1.4 GND1.1
  pour Top: 23.5,72 13,72 13,51.5 14.5,50 22.5,50 23.5,51
GND2
  Top 1.016: C9.1 R9.1 27.19,67.43 GND_3.1 GND2.4 | C10.1 R10.1 29.73,67.43 GND_3.2 GND2.3 | C11.1 R11.1 32.27,67.43 | 32.27,67.43 GND_3.3 GND2.2 | C12.1 R12.1 | 32.27,67.43 34.81,67.43 GND_3.4 GND2.1
  pour Top: 36,72 25.5,72 25.5,51.5 27,50 35,50 36,51
GND3
  Top 1.016: C13.1 R13.1 39.69,67.43 GND_4.1 GND3.4 | C14.1 R14.1 42.23,67.43 GND_4.2 GND3.3 | C15.1 R15.1 44.77,67.43 | 44.77,67.43 GND_4.3 GND3.2 | C16.1 R16.1 | 44.77,67.43 47.31,67.43 GND_4.4 GND3.1
  pour Top: 48.5,72 38,72 38,51.5 39.5,50 47.5,50 48.5,51
GND4
  Top 1.016: C17.1 R17.1 52.19,67.43 GND_5.1 GND4.4 | C18.1 R18.1 54.73,67.43 GND_5.2 GND4.3 | C19.1 R19.1 57.27,67.43 | 57.27,67.43 GND_5.3 GND4.2 | C20.1 R20.1 | 57.27,67.43 59.81,67.43 GND_5.4 GND4.1
  pour Top: 61,72 50.5,72 50.5,51.5 52,50 60,50 61,51
GND5
  Top 1.016: C21.1 R21.1 64.69,67.43 GND_6.1 GND5.4 | C22.1 R22.1 67.23,67.43 GND_6.2 GND5.3 | C23.1 R23.1 69.77,67.43 | 69.77,67.43 GND_6.3 GND5.2 | C24.1 R24.1 | 69.77,67.43 72.31,67.43 GND_6.4 GND5.1
  pour Top: 73.5,72 63,72 63,51.5 64.5,50 72.5,50 73.5,51
GND6
  Top 1.016: C25.1 R25.1 77.19,67.43 GND_7.1 GND6.4 | C26.1 R26.1 79.73,67.43 GND_7.2 GND6.3 | C27.1 R27.1 82.27,67.43 | 82.27,67.43 GND_7.3 GND6.2 | C28.1 R28.1 | 82.27,67.43 84.81,67.43 GND_7.4 GND6.1
  pour Top: 86,72 75.5,72 75.5,51.5 77,50 85,50 86,51
GND7
  Top 1.016: C29.1 R29.1 89.69,67.43 GND_8.1 GND7.4 | C30.1 R30.1 92.23,67.43 GND_8.2 GND7.3 | C31.1 R31.1 94.77,67.43 | 94.77,67.43 GND_8.3 GND7.2 | C32.1 R32.1 | 94.77,67.43 97.31,67.43 GND_8.4 GND7.1
  pour Top: 98.5,72 88,72 88,51.5 89.5,50 97.5,50 98.5,51
GND8
  Top 1.016: C33.1 R33.1 2.19,17.93 GND_9.1 GND8.4 | C34.1 R34.1 4.73,17.93 GND_9.2 GND8.3 | C35.1 R35.1 7.27,17.93 | 7.27,17.93 GND_9.3 GND8.2 | C36.1 R36.1 | 7.27,17.93 9.81,17.93 GND_9.4 GND8.1
  pour Top: 11,22.5 0.5,22.5 0.5,2 2,0.5 10,0.5 11,1.5
GND9
  Top 1.016: C37.1 R37.1 14.69,17.93 GND_10.1 GND9.4 | C38.1 R38.1 17.23,17.93 GND_10.2 GND9.3 | C39.1 R39.1 19.77,17.93 | 19.77,17.93 GND_10.3 GND9.2 | C40.1 R40.1 | 19.77,17.93 22.31,17.93 GND_10.4 GND9.1
  pour Top: 23.5,22.5 13,22.5 13,2 14.5,0.5 22.5,0.5 23.5,1.5
GND10
  Top 1.016: C41.1 R41.1 27.19,17.93 GND_11.1 GND10.4 | C42.1 R42.1 29.73,17.93 GND_11.2 GND10.3 | C43.1 R43.1 32.27,17.93 | 32.27,17.93 GND_11.3 GND10.2 | C44.1 R44.1 | 32.27,17.93 34.81,17.93 GND_11.4 GND10.1
  pour Top: 36,22.5 25.5,22.5 25.5,2 27,0.5 35,0.5 36,1.5
GND11
  Top 1.016: C45.1 R45.1 39.69,17.93 GND_12.1 GND11.4 | C46.1 R46.1 42.23,17.93 GND_12.2 GND11.3 | C47.1 R47.1 44.77,17.93 | 44.77,17.93 GND_12.3 GND11.2 | C48.1 R48.1 | 44.77,17.93 47.31,17.93 GND_12.4 GND11.1
  pour Top: 48.5,22.5 38,22.5 38,2 39.5,0.5 47.5,0.5 48.5,1.5
GND12
  Top 1.016: C49.1 R49.1 52.19,17.93 GND_13.1 GND12.4 | C50.1 R50.1 54.73,17.93 GND_13.2 GND12.3 | C51.1 R51.1 57.27,17.93 | 57.27,17.93 GND_13.3 GND12.2 | C52.1 R52.1 | 57.27,17.93 59.81,17.93 GND_13.4 GND12.1
  pour Top: 61,22.5 50.5,22.5 50.5,2 52,0.5 60,0.5 61,1.5
GND13
  Top 1.016: C53.1 R53.1 64.69,17.93 GND_14.1 GND13.4 | C54.1 R54.1 67.23,17.93 GND_14.2 GND13.3 | C55.1 R55.1 69.77,17.93 | 69.77,17.93 GND_14.3 GND13.2 | C56.1 R56.1 | 69.77,17.93 72.31,17.93 GND_14.4 GND13.1
  pour Top: 73.5,22.5 63,22.5 63,2 64.5,0.5 72.5,0.5 73.5,1.5
GND14
  Top 1.016: C57.1 R57.1 77.19,17.93 GND_15.1 GND14.4 | C58.1 R58.1 79.73,17.93 GND_15.2 GND14.3 | C59.1 R59.1 82.27,17.93 | 82.27,17.93 GND_15.3 GND14.2 | C60.1 R60.1 | 82.27,17.93 84.81,17.93 GND_15.4 GND14.1
  pour Top: 86,22.5 75.5,22.5 75.5,2 77,0.5 85,0.5 86,1.5
GND15
  Top 1.016: C61.1 R61.1 89.69,17.93 GND_16.1 GND15.4 | C62.1 R62.1 92.23,17.93 GND_16.2 GND15.3 | C63.1 R63.1 94.77,17.93 | 94.77,17.93 GND_16.3 GND15.2 | C64.1 R64.1 | 94.77,17.93 97.31,17.93 GND_16.4 GND15.1
  pour Top: 98.5,22.5 88,22.5 88,2 89.5,0.5 97.5,0.5 98.5,1.5
VCC
  Top 1.016: VREF.1 VREF.2 VREF.3 VREF.4
VCC1
  Top 1.016: VREF1.1 VREF1.2 VREF1.3 VREF1.4
VCC2
  Top 1.016: VREF2.1 VREF2.2 VREF2.3 VREF2.4
VCC3
  Top 1.016: VREF3.1 VREF3.2 VREF3.3 VREF3.4
VCC4
  Top 1.016: VREF4.1 VREF4.2 VREF4.3 VREF4.4
VCC5
  Top 1.016: VREF5.1 VREF5.2 VREF5.3 VREF5.4
VCC6
  Top 1.016: VREF6.1 VREF6.2 VREF6.3 VREF6.4
VCC7
  Top 1.016: VREF7.1 VREF7.2 VREF7.3 VREF7.4
VCC8
  Top 1.016: VREF8.1 VREF8.2 VREF8.3 VREF8.4
VCC9
  Top 1.016: VREF9.1 VREF9.2 VREF9.3 VREF9.4
VCC10
  Top 1.016: VREF10.1 VREF10.2 VREF10.3 VREF10.4
VCC11
  Top 1.016: VREF11.1 VREF11.2 VREF11.3 VREF11.4
VCC12
  Top 1.016: VREF12.1 VREF12.2 VREF12.3 VREF12.4
VCC13
  Top 1.016: VREF13.1 VREF13.2 VREF13.3 VREF13.4
VCC14
  Top 1.016: VREF14.1 VREF14.2 VREF14.3 VREF14.4
VCC15
  Top 1.016: VREF15.1 VREF15.2 VREF15.3 VREF15.4

## Text on the board
_tNames: VREF | VREF | VREF | VREF | VREF | VREF | VREF | VREF | SENSORES_1 | SENSORES_1 | SENSORES_1 | SENSORES_1 | SENSORES_1 | SENSORES_1 | SENSORES_1 | SENSORES_1 | SENSORES_2 | SENSORES_2 | SENSORES_2 | SENSORES_2 | SENSORES_2 | SENSORES_2 | SENSORES_2 | SENSORES_2 | SENSORES_3 | SENSORES_3 | SENSORES_3 | SENSORES_3 | SENSORES_3 | SENSORES_3 | SENSORES_3 | SENSORES_3 | R1 | R2 | R3 | R4 | R1 | R2 | R3 | R4 | R1 | R2 | R3 | R4 | R1 | R2 | R3 | R4 | R1 | R2 | R3 | R4 | R1 | R2 | R3 | R4 | R1 | R2 | R3 | R4 | R1 | R2 | R3 | R4 | C1 | C2 | C3 | C4 | C1 | C2 | C3 | C4 | C1 | C2 | C3 | C4 | C1 | C2 | C3 | C4 | C1 | C2 | C3 | C4 | C1 | C2 | C3 | C4 | C1 | C2 | C3 | C4 | C1 | C2 | C3 | C4 | GND_2 | GND_2 | GND_2 | GND_2 | GND_2 | GND_2 | GND_2 | GND_2 | GND | GND | GND | GND | GND | GND | GND | GND | VREF | VREF | VREF | VREF | VREF | VREF | VREF | VREF | SENSORES_1 | SENSORES_1 | SENSORES_1 | SENSORES_1 | SENSORES_1 | SENSORES_1 | SENSORES_1 | SENSORES_1 | SENSORES_2 | SENSORES_2 | SENSORES_2 | SENSORES_2 | SENSORES_2 | SENSORES_2 | SENSORES_2 | SENSORES_2 | SENSORES_3 | SENSORES_3 | SENSORES_3 | SENSORES_3 | SENSORES_3 | SENSORES_3 | SENSORES_3 | SENSORES_3 | R1 | R2 | R3 | R4 | R1 | R2 | R3 | R4 | R1 | R2 | R3 | R4 | R1 | R2 | R3 | R4 | R1 | R2 | R3 | R4 | R1 | R2 | R3 | R4 | R1 | R2 | R3 | R4 | R1 | R2 | R3 | R4 | C1 | C2 | C3 | C4 | C1 | C2 | C3 | C4 | C1 | C2 | C3 | C4 | C1 | C2 | C3 | C4 | C1 | C2 | C3 | C4 | C1 | C2 | C3 | C4 | C1 | C2 | C3 | C4 | C1 | C2 | C3 | C4 | GND_2 | GND_2 | GND_2 | GND_2 | GND_2 | GND_2 | GND_2 | GND_2 | GND | GND | GND | GND | GND | GND | GND | GND